# Altium PCB PCB1.PcbDoc
Units mil, origin at the board's own origin, x right, y up, seen from the top; angles counter-clockwise.
Board outline 3885 x 2290 mil, 2 copper layers (Top Layer, Bottom Layer); 12 components, 5 nets, 30 pads, 6 vias.
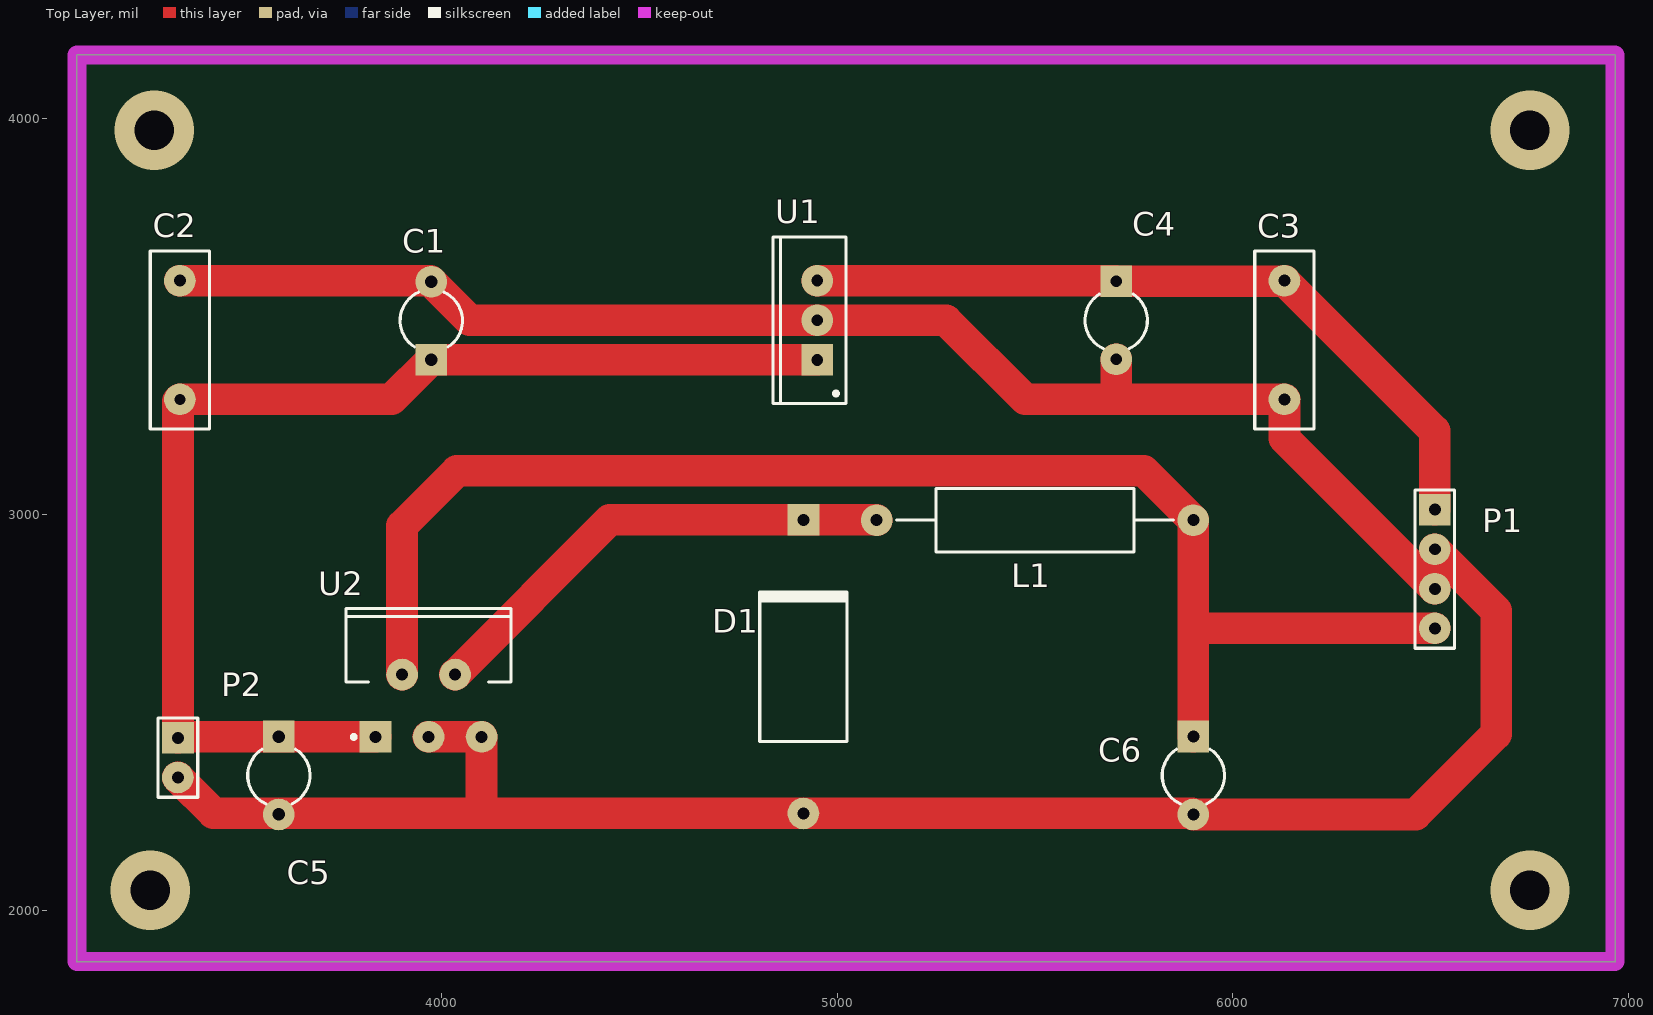
[diagram p0: Top Layer view]
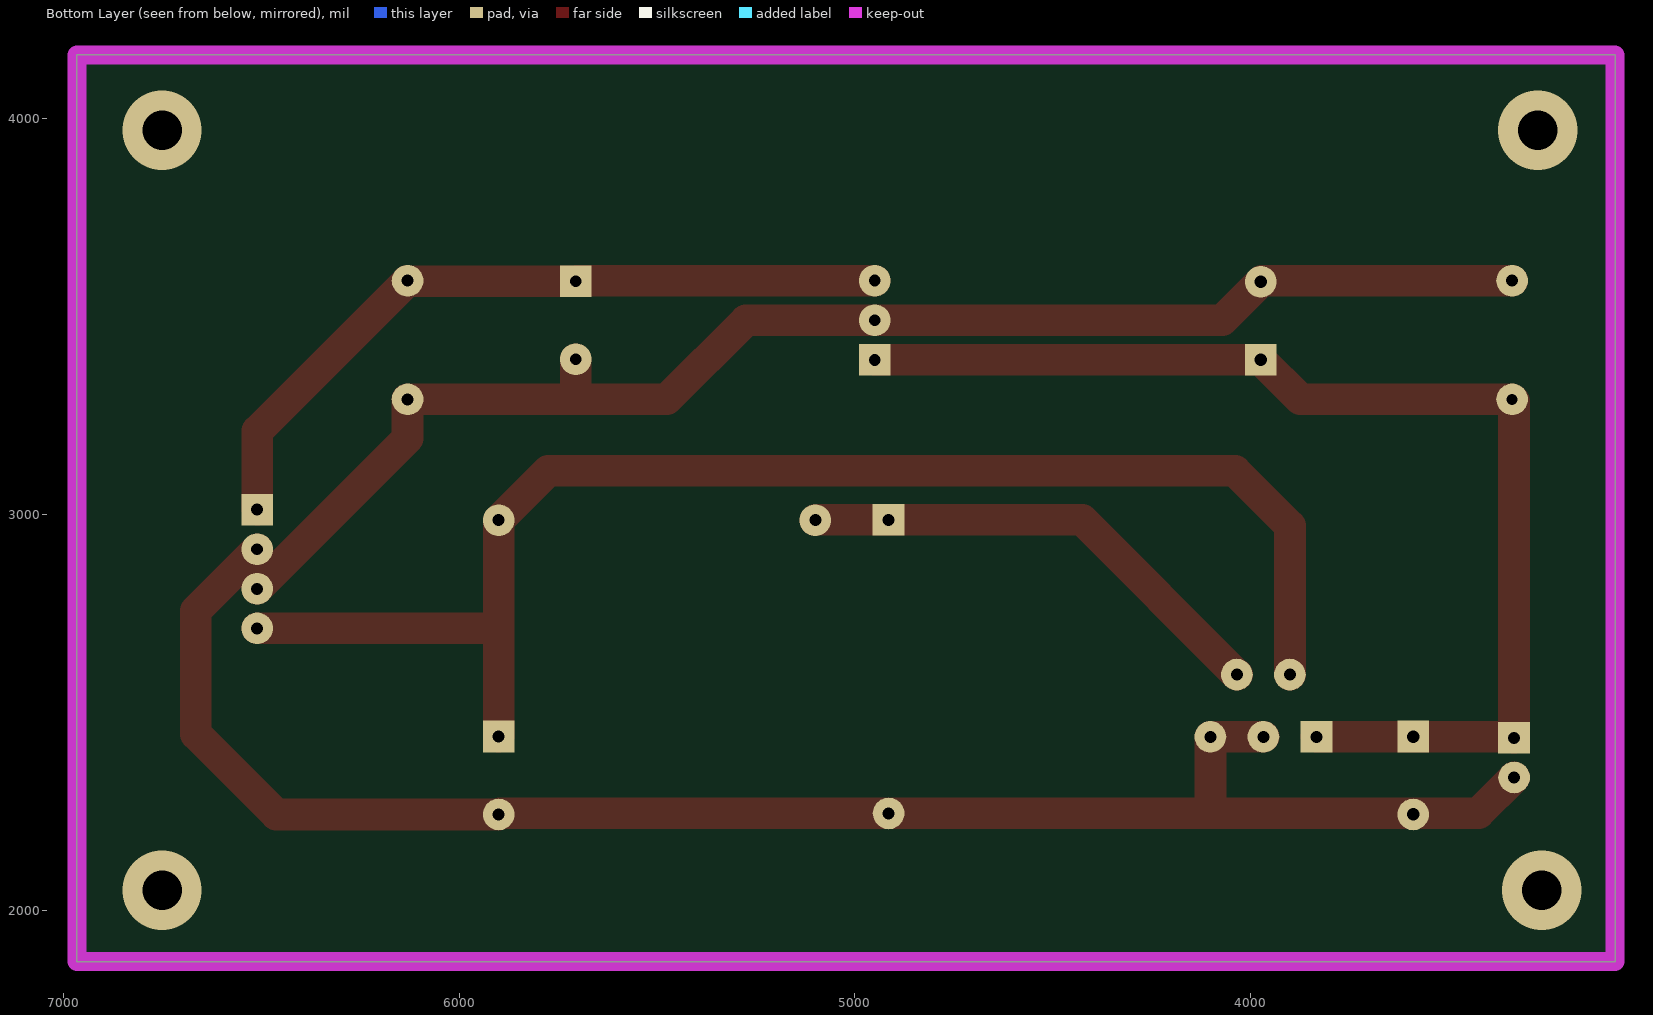
[diagram p1: Bottom Layer view, seen from below]

## Layer stack, top to bottom
Top Solder: solder mask 0.4, Solder Resist, Dk 3.5
Top Layer: signal copper 1.4
Dielectric 1: dielectric 12.6, FR-4, Dk 4.8
Bottom Layer: signal copper 1.4
Bottom Solder: solder mask 0.4, Solder Resist, Dk 3.5

## Board outline
3080,1870 3080,4160 6965,4160 6965,1870

## Design rules (kind name [scope] priority, off if disabled: settings)
Clearance [All] p1: gap=10
PolygonConnect [All] p1: connectstyle=Relief reliefconductorwidth=10 reliefentries=4 polygonreliefangle="90 Angle" airgapwidth=10
RoutingVias [All] p1: holewidth=28 width=50 viastyle="Through Hole" minholewidth=28 minwidth=50 maxholewidth=28 maxwidth=50
SolderMaskExpansion [All] p1: expansion=4
Width [All] p1: maxlimit=80 minlimit=80 preferedwidth=80
30 further rules are at their usual default settings.

## Components (designator, comment, footprint, x,y, rotation, side; value= is the part's Value field where it differs from the comment)
C1 "Cap2" CAPR5-4X5#1 3975,3489 r90 top
C2 "Cap" RAD-0.3#1 3340,3440 r270 top
C3 "Cap" RAD-0.3#2 6130,3440 r90 top
C4 "Cap2" CAPR5-4X5#2 5705,3490 r270 top
C5 "Cap2" CAPR5-4X5#1 3590,2340 r270 top
C6 "Cap2" CAPR5-4X5#2 5900,2340 r270 top
D1 "1N5408" DO-201AD 4915,2615 r90 top
L1 "Inductor Adj" AXIAL-0.8 5500,2985 r0 top
P1 "Header 4" HDR1X4 6510,3011.57 r270 top
P2 "Header 2" HDR1X2 3335,2435 r270 top
U1 "LM2940CT-5.0" T03B 4950,3490 r90 top
U2 "LM2596T-3.3" T05D 3968.07,2516.26 r0 top

## Footprints (in the part's own frame and the unit in brackets; to place one, negate y for a bottom-side part, rotate by r counter-clockwise, add the part's x,y. Pads: shape width x height; smd on the part's side, far side on the other; paste and mask are expansions set on the pad)
AXIAL-0.8 [mil] "Axial Device, Thru-Hole; 2 Leads; 0.8 in Pin Spacing"
  round 80 hole 30: 1(-400,0) 2(400,0)
  silkscreen extent -350,-80 350,80
CAPR5-4X5#1 [mil] "Capacitor; 2 Leads"
  rect 80x80 hole 31.5: 1(-98.43,0)
  round 80 hole 31.5: 2(98.43,0)
  silkscreen extent -66,-79 72,79
CAPR5-4X5#2 [mil] "Capacitor; 2 Leads"
  rect 80x80 hole 30: 1(-98.43,0)
  round 80 hole 30: 2(98.42,0)
  silkscreen extent -66,-79 72,79
DO-201AD [mil] "Diode, Axial; Body 9.5 x 5.3 mm (LxDia. max), Lead Dia. 1.32 mm (max)"
  round 80 hole 30: 1(-370.87,0)
  rect 80x80 hole 30: 2(370.87,0)
  silkscreen extent -189,-110 193,110
HDR1X2 [mil] "Connector; Header; 2 Position"
  rect 80x80 hole 30: 1(0,0)
  round 80 hole 30: 2(100,0)
  silkscreen extent -50,-50 150,50
HDR1X4 [mil] "Connector; Header; 4 Position"
  rect 80x80 hole 30: 1(0,0)
  round 80 hole 30: 2(100,0) 3(200,0) 4(300,0)
  silkscreen extent -50,-50 350,50
RAD-0.3#1 [mil] "Radial Cap, Thru-Hole; 2 Leads; 0.3 in Pin Spacing"
  round 80 hole 30: 1(-150,0)
  round 80 hole 27.56: 2(150,0)
  silkscreen extent -225,-75 225,75
RAD-0.3#2 [mil] "Radial Cap, Thru-Hole; 2 Leads; 0.3 in Pin Spacing"
  round 80 hole 30: 1(-150,0) 2(150,0)
  silkscreen extent -225,-75 225,75
T03B [mil] "TO, Thru-Hole, Vertical, Heatsink Mounted; 3 In-Line Leads; Pitch 2.54 mm"
  rect 80x80 hole 30: 1(-100,0)
  round 80 hole 30: 2(0,0) 3(100,0)
  silkscreen extent -211,-73 211,112, body extent -213,-75 213,114, height 764
T05D [mil] "TO, Thru-Hole, Vertical, Heatsink Mounted; 5 Bent Staggered Leads; Body 10.3x8.6x4.6mm, Pitch 1.7 mm"
  rect 80x80 hole 30: 1(-133.86,-78.74)
  round 80 hole 30: 2(-66.93,78.74) 3(0,-78.74) 4(66.93,78.74) 5(133.86,-78.74)
  silkscreen extent -209,-84 209,245, body extent -211,-91 211,247, height 831

## Part data
C1 C2 C3 C4 C5 C6: "Capacitor"
D1: "3 Amp Medium Power Silicon Rectifier Diode"
L1: "Adjustable Inductor"
P1: "Header, 4-Pin"
P2: "Header, 2-Pin"
U1: "1A Low Dropout Regulator, 3-pin TO-220"
U2: "SIMPLE SWITCHER?Power Converter 150 KHz 3A Step-Down Voltage Regulator, 5-pin TO-220"

## Via types
v1: diameter 200, hole 100, Top Layer to Bottom Layer, 4 vias
v2: diameter 50, hole 28, Top Layer to Bottom Layer, 2 vias

## Nets (pads, with @x,y where several pads share a name; then routed paths per layer and width w, separated by ;. In a path a pad name is that pad's centre, name@x,y a point inside that pad or via, vN(x,y) a via of type N, cw(c..) or ccw(c..) an arc to the next point about the centre after c; other vN are vias at no path point)
GND: C1.2 C2.1 C3.1 C4.2 C5.2 C6.2 D1.1 P1.2 P1.3 P2.2 U1.2 U2.3 U2.5 | length 8064.7
  Top Layer w80: P2.2 3425,2245 4095,2245 ; C2.1 3972.43,3590 C1.2 4072.43,3490 U1.2 5275,3490 5475,3290 5705,3290 ; U2.3 U2.5 4101.93,2251.93 4095,2245 ; C4.2 5705,3290 ; 4095,2245 5896.58,2245 C6.2 6461.58,2241.58 6665,2445 6665,2756.57 P1.2 P1.3 6130,3191.57 C3.1 5705,3290
NetC3_2: C3.2 C4.1 P1.1 U1.3 | length 1924.2
  Top Layer w10: U1.3 U1.3@4955,3595
  Top Layer w80: U1.3 5703.43,3590 C4.1 6128.43,3588.43 C3.2 6510,3210 P1.1
NetC6_1: C6.1 L1.2 P1.4 U2.2 | length 3641.8
  Top Layer w80: U2.2 3901.14,2971.14 4040,3110 5775,3110 L1.2 5900,2709.21 ; C6.1 5900,2709.21 ; P1.4 5902.36,2711.57 5900,2709.21
NetD1_2: D1.2 L1.1 U2.4 | length 1227.3
  Top Layer w80: U2.4 4425.87,2985.87 D1.2 5099.13,2985.87 L1.1
VCC: C1.1 C2.2 C5.1 P2.1 U1.1 U2.1 | length 3009.2
  Top Layer w80: U2.1 3337.52,2437.52 P2.1 3335,3285 C2.2 3874.43,3290 C1.1 4949.43,3390.57 U1.1
copper on no net:
  other v1: 3265,2050 6750,2050 3275,3970 6750,3970
  other v2: 3265,2045 3275,2045

## Keep-outs
Keep-Out Layer:
  the board outline again, w47.24